# EAGLE board ponte_h_com_arduino (EAGLE 9.7.0)

Size 300.08 x 83.5 mm. Coordinates in mm from the lower left corner, seen from the top.
Outline: 0,0 300.08,0 300.08,83.5 0,83.5 0,0
Copper layers (1*16): Top 0.035mm / dielectric 1.5mm / Bottom 0.035mm
Design rules "default": minimum track width 6mil, minimum drill 0.35mm, track to track 6mil, track to pad 6mil, pad to pad 6mil, via to via 6mil, smd to smd 6mil, copper to edge 40mil, drill to drill 6mil, minimum pad ring 10mil, minimum via ring 8mil, stop-mask expansion 4mil, vias tented up to drill 0mil, thermal gap 10mil

## Footprints (pad centres in the part's own frame; a part is rotated, then mirrored left to right if it is on the bottom)
BATTERY-GENERIC = drill 1.118 pad 3.15 octagon: + 2.54,0; - -2.54,0
MOTOR = drill 1.118 pad 3.15 octagon: + 2.54,0; - -2.54,0
SWITCH-SPDT-PTH-8.5X3.7MM = drill 1.016 pad 1.88: 1 -2.54,0; 2 0,0; 3 2.54,0
DIP762W53P254L1969H508Q16B = drill 0.743 pad 1.343: 1 -3.81,8.89; 2 -3.81,6.35; 3 -3.81,3.81; 4 -3.81,1.27; 5 -3.81,-1.27; 6 -3.81,-3.81; 7 -3.81,-6.35; 8 -3.81,-8.89; 9 3.81,-8.89; 10 3.81,-6.35; 11 3.81,-3.81; 12 3.81,-1.27; 13 3.81,1.27; 14 3.81,3.81; 15 3.81,6.35; 16 3.81,8.89
ARDUINO-UNO-R3-SHIELD = drill 1.016 pad 1.88: 3.3V 24.13,-2.54; 5V 24.13,0; A0 24.13,12.7; A1 24.13,15.24; A2 24.13,17.78; A3 24.13,20.32; A4 24.13,22.86; A5 24.13,25.4; AREF -24.13,-13.97; D2 -24.13,20.32; D3 -24.13,17.78; D4 -24.13,15.24; D5 -24.13,12.7; D6 -24.13,10.16; D7 -24.13,7.62; D8 -24.13,3.81; D9 -24.13,1.27; D10 -24.13,-1.27; D11 -24.13,-3.81; D12 -24.13,-6.35; D13 -24.13,-8.89; GND@0 24.13,2.54; GND@1 24.13,5.08; GND@2 -24.13,-11.43; IOREF 24.13,-7.62; NC 24.13,-10.16; RES 24.13,-5.08; RX -24.13,25.4; SCL -24.13,-19.05; SDA -24.13,-16.51; TX -24.13,22.86; VIN 24.13,7.62

## Placement (x,y rotation side)
BAT1  9V  [BATTERY-GENERIC]  291.83,67.09 0 top
M1  MOTOR_HDR  [MOTOR]  139.42,74.99 0 top
M2  MOTOR_HDR  [MOTOR]  163.76,75.24 0 top
S1  TOGGLE  [SWITCH-SPDT-PTH-8.5X3.7MM]  110.24,67.7 0 top
S2  TOGGLE  [SWITCH-SPDT-PTH-8.5X3.7MM]  119.06,67.48 0 top
S3  TOGGLE  [SWITCH-SPDT-PTH-8.5X3.7MM]  127.97,67.6 0 top
S4  TOGGLE  [SWITCH-SPDT-PTH-8.5X3.7MM]  186.48,68.39 0 top
S5  TOGGLE  [SWITCH-SPDT-PTH-8.5X3.7MM]  195.45,68.33 0 top
S6  TOGGLE  [SWITCH-SPDT-PTH-8.5X3.7MM]  204.21,68.3 0 top
U1  L293E  [DIP762W53P254L1969H508Q16B]  162.15,29.37 90 top
U2  ARDUINO-UNO-R3-SHIELD  [ARDUINO-UNO-R3-SHIELD]  47.88,29.84 270 top

## Library data of the parts
BAT1 M1 M2 S1-S6 U1 U2 = Tinkercad

## Nets
BAT1+: BAT1.+ U1.8
BAT1-: BAT1.- S1.3 S2.3 S3.3 S4.3 S5.3 S6.3 U1.4 U1.5 U1.12 U1.13 U2.GND@0 U2.GND@1 U2.GND@2
M1_+: M1.+ U1.6
M1_-: M1.- U1.3
M2_+: M2.+ U1.11
M2_-: M2.- U1.14
U2_5V: S1.1 S2.1 S3.1 S4.1 S5.1 S6.1 U1.16 U2.5V
U2_D2: U1.1 U2.D2
U2_D3: U1.2 U2.D3
U2_D4: U1.7 U2.D4
U2_D5: U1.9 U2.D5
U2_D6: U1.10 U2.D6
U2_D7: U1.15 U2.D7

## Tracks (layer width: path | path; a pad name or v marks a point on that pad's centre or on a via)
BAT1+  (1 unrouted)
BAT1-  (13 unrouted)
M1_+  (1 unrouted)
M1_-  (1 unrouted)
M2_+  (1 unrouted)
M2_-  (1 unrouted)
U2_5V  (7 unrouted)
U2_D2  (1 unrouted)
U2_D3  (1 unrouted)
U2_D4  (1 unrouted)
U2_D5  (1 unrouted)
U2_D6  (1 unrouted)
U2_D7  (1 unrouted)